# Altium PCB TPA6120A2 Headphone Amp.PcbDoc
Units mm, origin at the board's own origin, x right, y up, seen from the top; angles counter-clockwise.
Board outline 110 x 120 mm, 2 copper layers (Top Layer, Bottom Layer), stack 1.571 mm thick; 43 components, 26 nets, 121 pads, 140 vias.
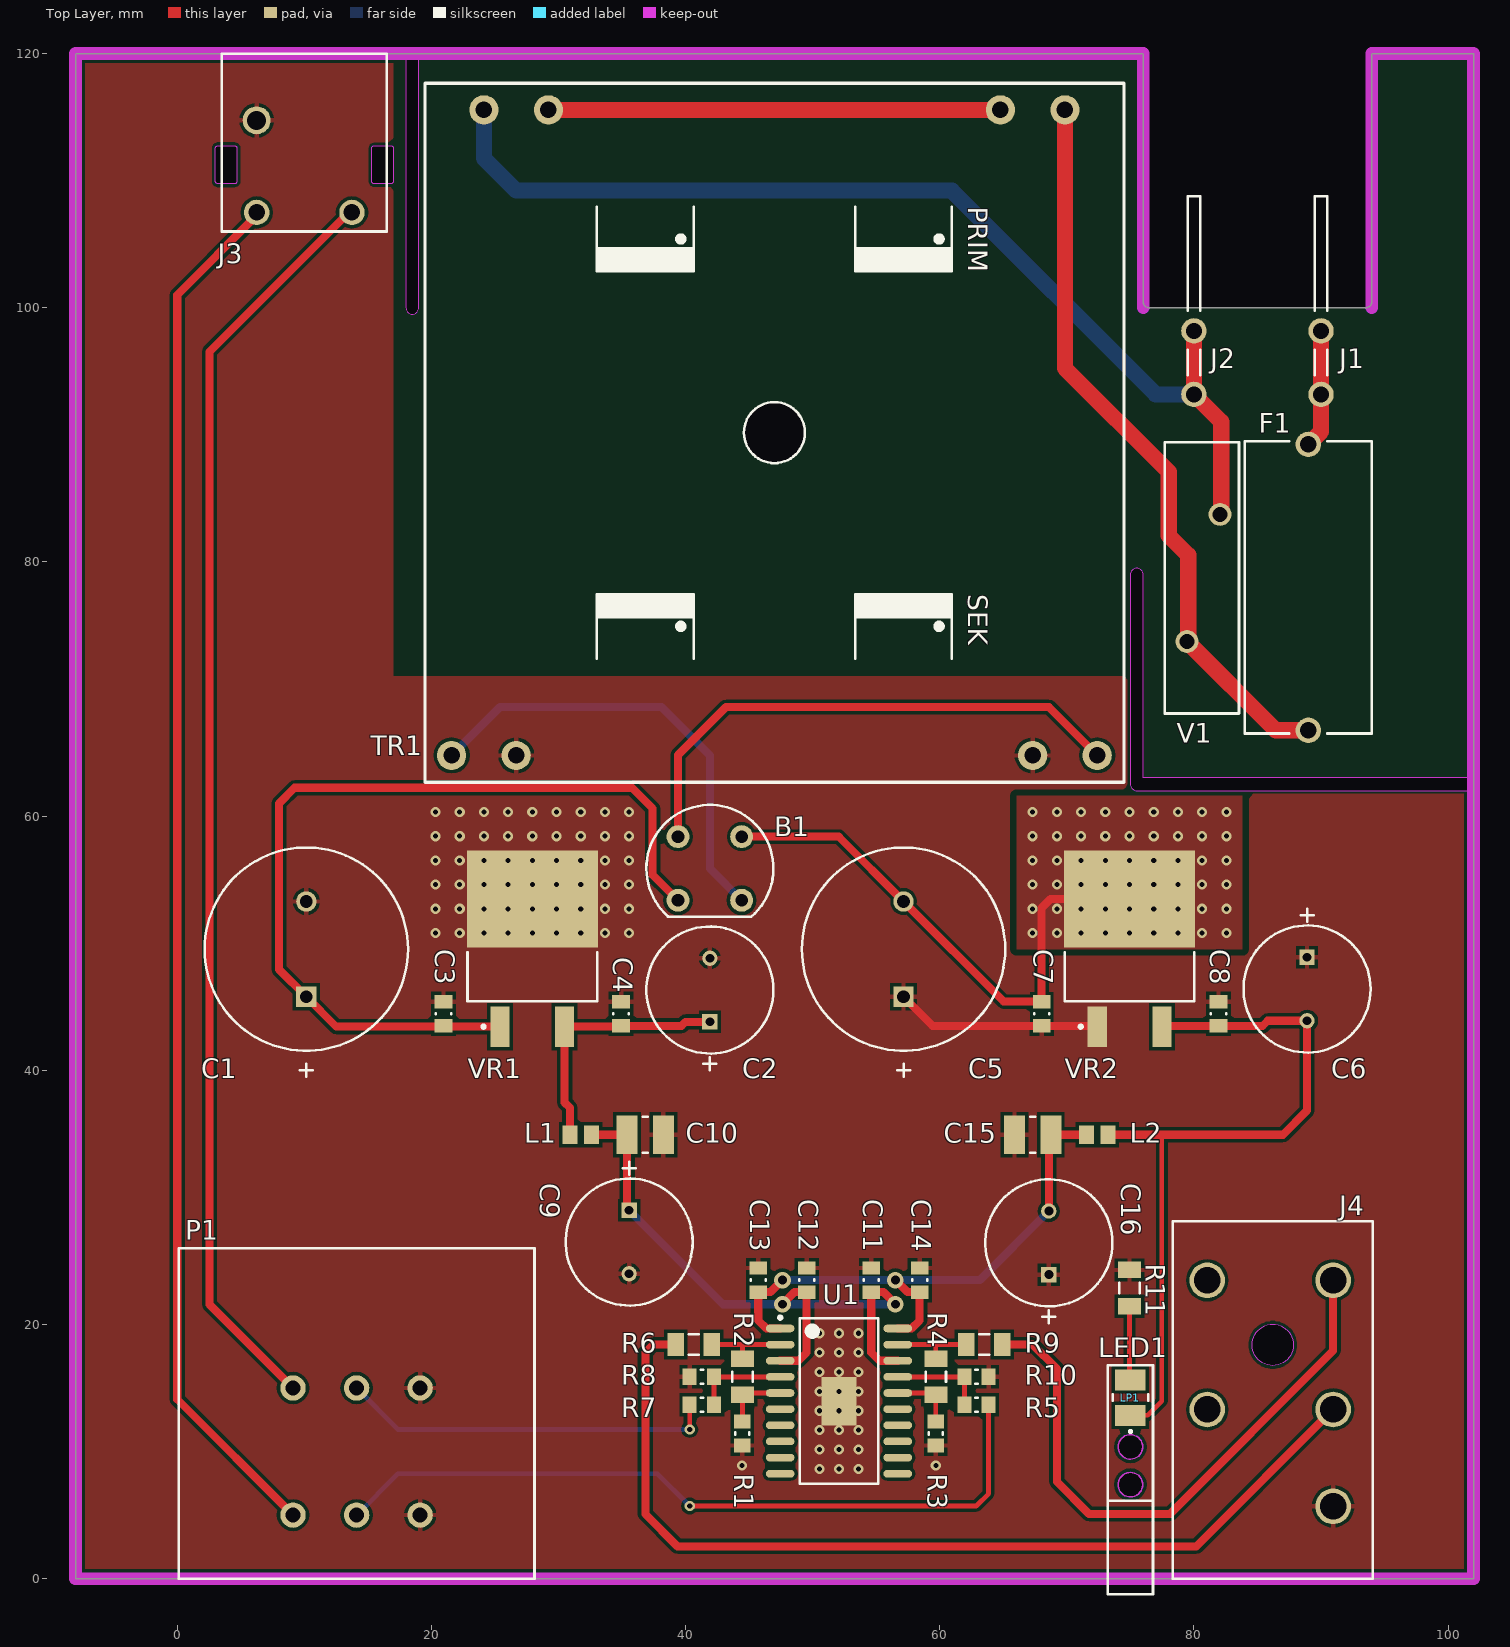
[diagram p0: Top Layer view]
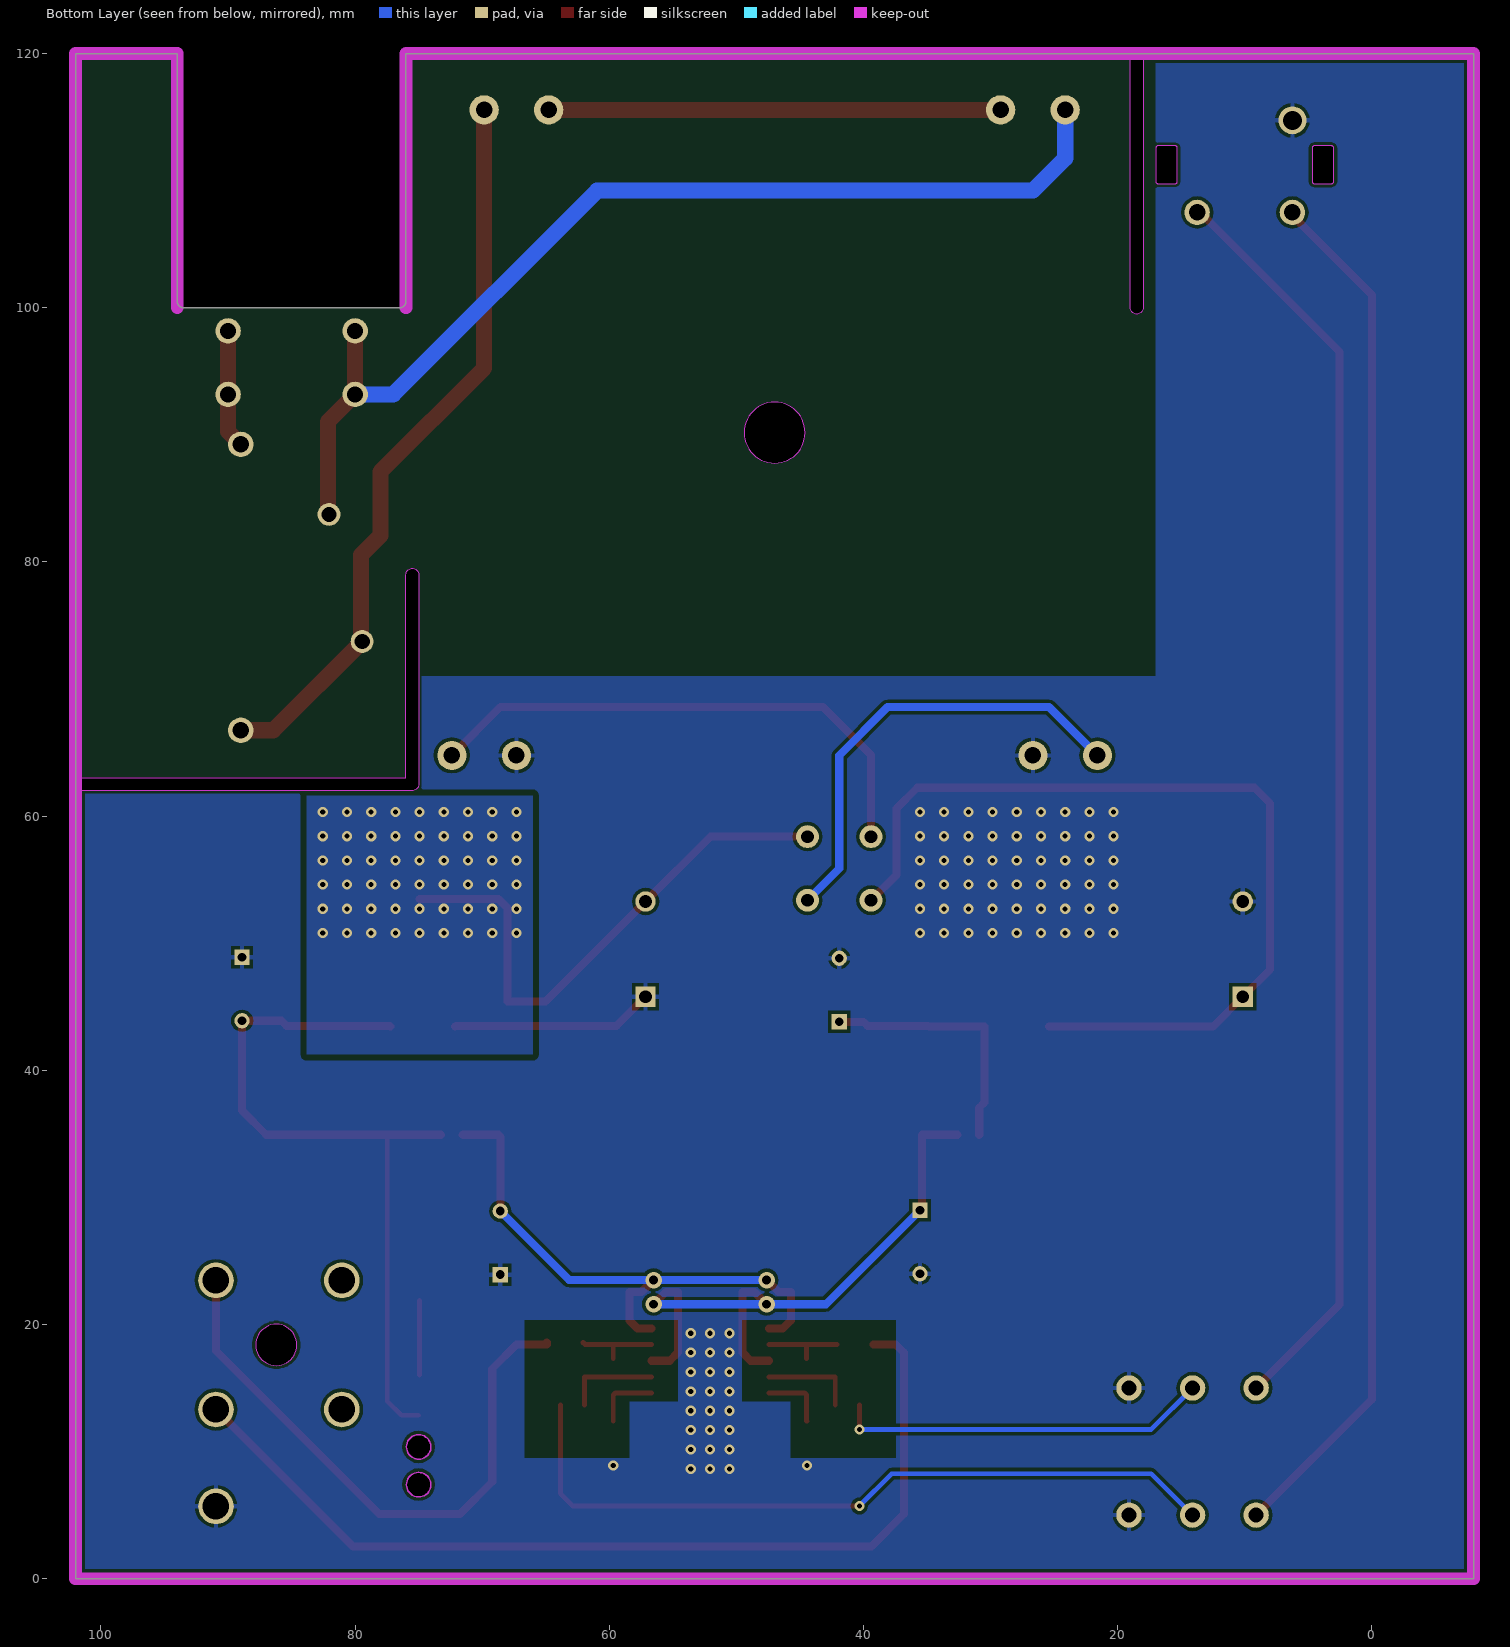
[diagram p1: Bottom Layer view, seen from below]
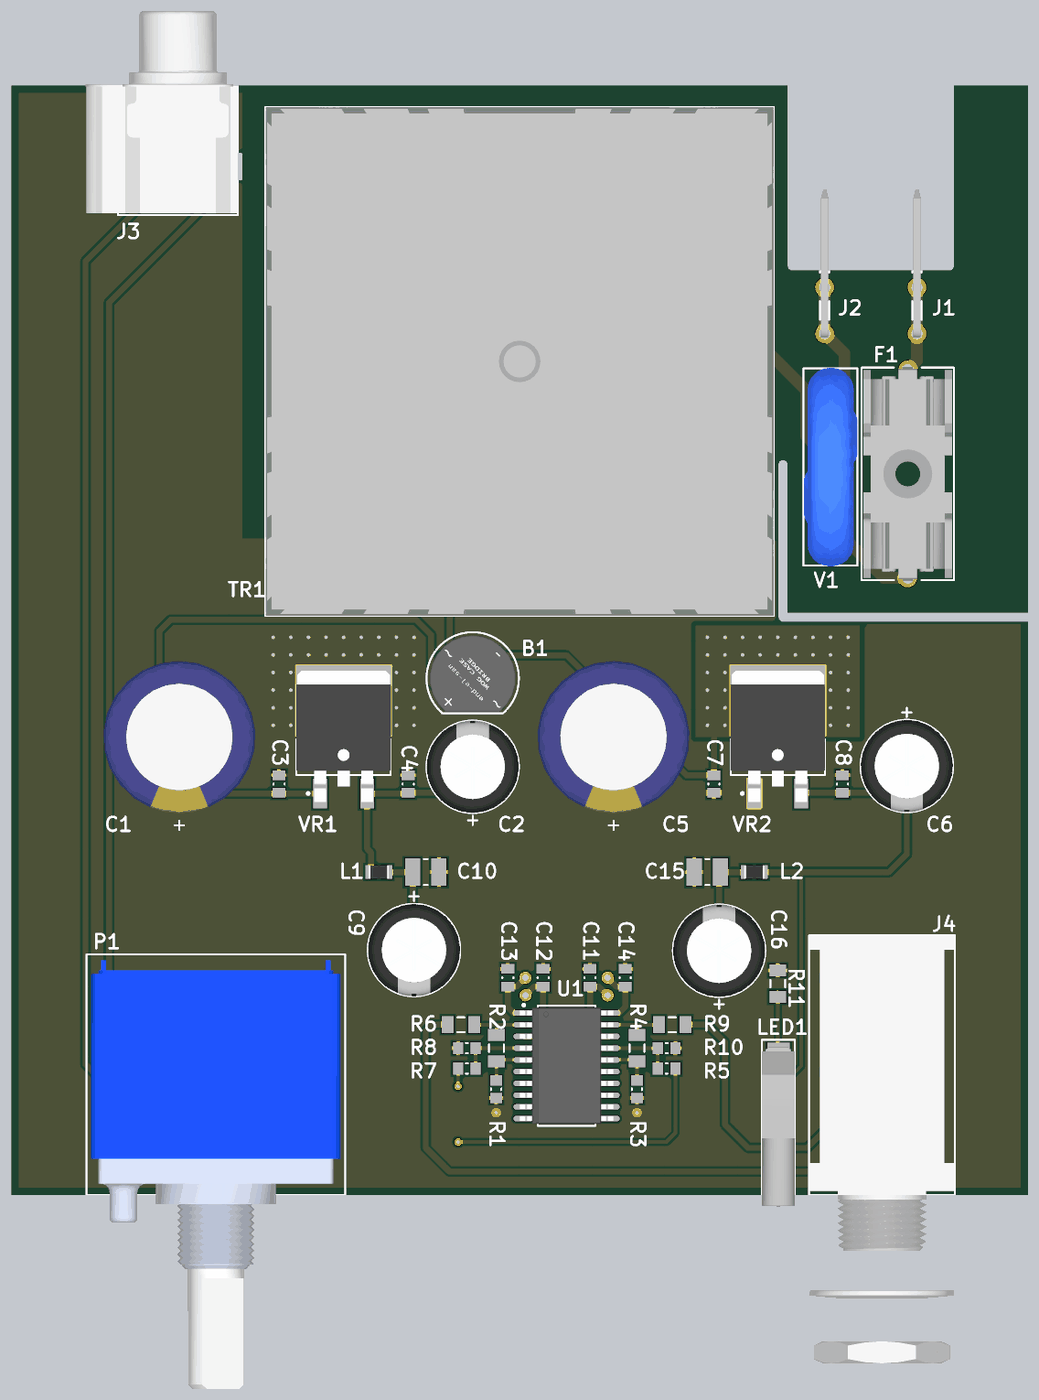
[diagram p2: 3D render of the assembled board from above, using the file's embedded part models]

## Layer stack, top to bottom
Top Solder: solder mask 0.0102, Solder Resist, Dk 3.5
Top Layer: signal copper 0.0356
Dielectric 1: dielectric 1.5, FR-4, Dk 4.8
Bottom Layer: signal copper 0.0356
Bottom Solder: solder mask 0.0102, Solder Resist, Dk 3.5

## Board outline
-8,0 102,0 102,120 94,120 94,100.5 cw(c93.5,100.5) 93.5,100 76.5,100 cw(c76.5,100.5) 76,100.5 76,120 -8,120
cut-out: 75,79 75,62.5 ccw(c75.5,62.5) 75.5,62 102,62 102,63 76,63 76,79 ccw(c75.5,79)
cut-out: 18,120 18,100 ccw(c18.5,100) 19,100 19,120

## Design rules (kind name [scope] priority, off if disabled: settings)
Clearance Clearance_VIN [InNet('-VIN')] p1: gap=0.254 ignorepadtopadclearanceinfootprint=FALSE except(0: Arc-Hole Track-Hole SMDPad-Hole THPad-Hole Via-Hole Fill-Hole Poly-Hole Region-Hole Text-Hole; 0.508: Poly-Poly)
Clearance "Schematic Clearance Constraint" [InNetClass('Mains')] p2: gap=2.5 ignorepadtopadclearanceinfootprint=FALSE except(0: Arc-Hole Track-Hole SMDPad-Hole THPad-Hole Via-Hole Fill-Hole Poly-Hole Region-Hole Text-Hole)
Clearance [All] p3: gap=0.254 ignorepadtopadclearanceinfootprint=FALSE except(0: Arc-Hole Track-Hole SMDPad-Hole THPad-Hole Via-Hole Fill-Hole Poly-Hole Region-Hole Text-Hole)
Height [All] p1: minheight=0 maxheight=50 prefheight=12.7
MinimumSolderMaskSliver MinimumSolderMaskSliver_Thermal [HasFootprint('TI-DWP20-3730X2350TP_N')] p1: minsoldermaskwidth=0.076
MinimumSolderMaskSliver [All] p2: minsoldermaskwidth=0.254
PolygonConnect PolygonConnect_Thermal [HasFootprint('TI-DWP20-3730X2350TP_N') OR HasFootprint('D2PAK') OR (IsVia AND InNet('GND')) OR (IsVia AND InNet('-VIN'))] p1: connectstyle=Direct reliefconductorwidth=0.254 reliefentries=4 polygonreliefangle="90 Angle" airgapwidth=0.254
PolygonConnect [All] p2: connectstyle=Relief reliefconductorwidth=0.381 reliefentries=4 polygonreliefangle="90 Angle" airgapwidth=0.254
RoutingVias [All] p1: holewidth=0.6 width=1.2 viastyle="Through Hole" minholewidth=0.4 minwidth=0.8 maxholewidth=0.7 maxwidth=1.3
SilkToSilkClearance [All] p1: silktosilkclearance=0.102
SilkToSolderMaskClearance [IsPad] p1: minsilkscreentomaskgap=0.152 clearancetoexposedcopper=TRUE
SolderMaskExpansion [All] p1: expansion=0.102
Width "Schematic Width Constraint" [InNetClass('Mains')] p1: maxlimit=1.27 minlimit=0.508 preferedwidth=0.762
Width [All] p2: maxlimit=0.635 minlimit=0.254 preferedwidth=0.381
26 further rules are at their usual default settings.

## Classes and differential pairs
net class Mains: NetF1_1 NetF1_2 NetJ2_1 NetTR1_4

## Components (designator, comment, footprint, x,y, rotation, side; value= is the part's Value field where it differs from the comment)
B1 "100V, 1.5A" WOG 41.91,55.88 r0 top
C1 "4700µF" "CAP POL 16x25 RM 7.5MM" 10.16,49.53 r270 top
C2 "100µF" "cap pol 10x12.5mm rm 5mm" 41.91,43.815 r90 top
C3 "100nF" CAP0805_M 20.955,44.45 r270 top
C4 "100nF" CAP0805_M 34.925,44.45 r270 top
C5 "4700µF" "CAP POL 16x25 RM 7.5MM" 57.15,49.53 r270 top
C6 "100µF" "cap pol 10x12.5mm rm 5mm" 88.9,48.895 r270 top
C7 "100nF" CAP0805_M 68.018,44.45 r270 top
C8 "100nF" CAP0805_M 81.936,44.45 r90 top
C9 "100µF" "cap pol 10x12.5mm rm 5mm" 35.56,28.986 r270 top
C10 "10µF" CAP1210_M 36.83,34.925 r180 top
C11 "100nF" CAP0805_M 54.61,23.495 r270 top
C12 "100nF" CAP0805_M 49.53,23.495 r270 top
C13 "100nF" CAP0805_M 45.72,23.495 r270 top
C14 "100nF" CAP0805_M 58.42,23.495 r270 top
C15 "10µF" CAP1210_M 67.31,34.925 r0 top
C16 "100µF" "cap pol 10x12.5mm rm 5mm" 68.58,23.918 r90 top
F1 "Fuse 5x20mm" 0031.8201 89,78 r270 top
J1 "" 928814-1 90,95.68 r90 top
J2 "" 928814-1 80,95.68 r90 top
J3 "Dual RCA Socket" PJRAS1X2S__X 10,120 r180 top
J4 "Headphone Jack, 1/4\" 3 Pos." RA49B 86,0 r270 top
L1 "330R@100MHz" INDC2012X14N 31.75,34.925 r0 top
L2 "330R@100MHz" INDC2012X14N 72.39,34.925 r0 top
LED1 "597-3XXX-20XF" 597-3XXX-20XF 75,14.25 r270 top
LP1 "Light pipe" 515-1049F 75,14.25 r90 top
P1 "ALPS 50k, stereo" "ALPS RK27112" 14.11,10 r270 top
R1 "1k" RES0805_M 44.45,11.43 r90 top
R2 "1k" RES1206_M 44.479,15.875 r270 top
R3 "1k" RES0805_M 59.69,11.43 r90 top
R4 "1k" RES1206_M 59.69,15.875 r270 top
R5 "49R9" RES0805_M 62.894,13.671 r180 top
R6 "10R" RES1206_M 40.64,18.415 r180 top
R7 "49R9" RES0805_M 41.275,13.671 r0 top
R8 "4k02" RES0805_M 41.275,15.875 r0 top
R9 "10R" RES1206_M 63.5,18.415 r0 top
R10 "4k02" RES0805_M 62.894,15.875 r180 top
R11 "560R" RES1206_M 74.93,22.86 r90 top
TR1 "10VA, 2x15V" "Talema 10VA" 46.99,90.17 r270 top
U1 "TPA6120A2" TI-DWP20-3730X2350TP_N 52.07,13.97 r0 top
V1 "275VAC, 215J" S20K275E2 80.752,78.74 r270 top
VR1 "12V, 1A" D2PAK 27.94,49.53 r90 top
VR2 "-12V, 1A" D2PAK 74.93,49.53 r90 top

## Footprints (in the part's own frame and the unit in brackets; to place one, negate y for a bottom-side part, rotate by r counter-clockwise, add the part's x,y. Pads: shape width x height; smd on the part's side, far side on the other; paste and mask are expansions set on the pad)
0031.8201 [mm] "Schurter, offener Sicherungshalter, 5 x 20 mm"
  round 2 hole 1.3: 1(-11.25,0) 2(11.25,0)
  silkscreen extent -11.5,-5 11.5,5, body extent -11.55,-4.8 11.55,4.8, height 11.5
515-1049F [mm] "Dialight 515-1049F Lightpipe"
  Keep-Out Layer board cut-out: -3.886,-0.965 -4.256,-0.892 -4.569,-0.682 -4.778,-0.369 -4.851,0 -4.851,0 -4.778,0.369 -4.569,0.682 -4.256,0.892 -3.886,0.965 -3.886,0.965 -3.517,0.892 -3.204,0.682 -2.994,0.369 -2.921,0 -2.921,0 -2.994,-0.369 -3.204,-0.682 -3.517,-0.892 -3.886,-0.965
  Keep-Out Layer board cut-out: -6.858,-0.965 -7.227,-0.892 -7.54,-0.682 -7.75,-0.369 -7.823,0 -7.823,0 -7.75,0.369 -7.54,0.682 -7.227,0.892 -6.858,0.965 -6.858,0.965 -6.489,0.892 -6.176,0.682 -5.966,0.369 -5.893,0 -5.893,0 -5.966,-0.369 -6.176,-0.682 -6.489,-0.892 -6.858,-0.965
  Keep-Out Layer circle w0.1: c-3.886,0 r0.965
  Keep-Out Layer circle w0.1: c-6.858,0 r0.965
  silkscreen extent -15.49,-1.78 2.54,1.78, body extent -15.49,-1.78 1.27,1.78, height 5.27
597-3XXX-20XF [mil] "Dialight 597-3XXX-20XF"
  rect 65x95 smd: 1(-55,0) 2(55,0)
  silkscreen extent -10,-55 109,55, body extent -69,-55 69,55, height 81
928814-1 [mm] "Flachstecker für Printmontage, Breite 6,35mm"
  round 2 hole 1.25: 1(-2.5,0) 1(2.5,0)
  silkscreen extent -1,-0.5 13.1,0.5, body extent -2.9,-0.4 13.1,0.4, height 7.6
"ALPS RK27112" [mm] "ALPS RK27112, Stereo Audio Pot"
  round 2 hole 1.2: 1(5,-5) 2(5,0) 3(5,5) 4(-5,-5) 5(-5,0) 6(-5,5)
  silkscreen extent -16,-14 10,14, body extent -15.4,-13.5 31,13.5, height 25
CAP0805_M [mm] "Chip Capacitor, 2-Leads, Body 2,00x1,25mm, IPC Medium Density"
  rect 1.05x1.4 smd: 1(-0.95,0) 2(0.95,0)
  silkscreen extent -0.05,-0.6 0.05,0.6, body extent -1.05,-0.67 1.05,0.67, height 0.6
CAP1210_M [mm] "Chip Capacitor, 2-Leads, Body 3,50x2,85mm, IPC Medium Density"
  rect 1.65x3 smd: 1(-1.425,0) 2(1.425,0)
  silkscreen extent -0.2,-1.4 0.2,1.4, body extent -1.85,-1.5 1.85,1.5, height 2.1
"cap pol 10x12.5mm rm 5mm" [mm]
  rect 1.2x1.2 hole 0.7: 1(0,0)
  round 1.2 hole 0.7: 2(5,0)
  silkscreen extent -3.81,-5 7.5,5, body extent -2.5,-5 7.5,5, height 12.5
"CAP POL 16x25 RM 7.5MM" [mm]
  rect 1.6x1.6 hole 1: 1(3.75,0)
  round 1.6 hole 1: 2(-3.75,0)
  silkscreen extent -8,-8 10.05,8, body extent -8.25,-8.25 8.25,8.25, height 33.5
D2PAK [mm] "D2-PAK, 3-Pads, Body 7,77x8,48mm (max), IPC Medium Density"
  rect 3.2x1.5 smd: 1(-6.1,2.54) 3(-6.1,-2.54)
  rect 7.6x10.3 smd: 4(3.95,0)
  silkscreen extent -6.22,-5.1 -0.25,5.1, body extent -7.03,-5.13 7.17,5.13, height 4.57
INDC2012X14N [mm] "Chip Inductor, 2-Leads, Body 2,00x1,25mm, IPC Medium Density"
  rect 1.19x1.47 smd: 1(-0.855,0) 2(0.855,0)
  body extent -1.1,-0.72 1.1,0.72, height 1.45
PJRAS1X2S__X [mm] "2 vertical pos. RCA jack"
  round 2 hole 1.3: 1(-3.75,12.5) 2(3.75,12.5)
  round 2.2 hole 1.5: 3(3.75,5.25)
  Keep-Out Layer board cut-out: 5.3,7.45 5.3,10.05 5.315,10.127 5.359,10.191 5.423,10.235 5.5,10.25 5.5,10.25 6.8,10.25 6.9,10.223 6.973,10.15 7,10.05 7,10.05 7,7.45 6.973,7.35 6.9,7.277 6.8,7.25 6.8,7.25 5.5,7.25 5.4,7.277 5.327,7.35 5.3,7.45
  Keep-Out Layer board cut-out: -7,7.45 -7,10.05 -6.973,10.15 -6.9,10.223 -6.8,10.25 -6.8,10.25 -5.5,10.25 -5.4,10.223 -5.327,10.15 -5.3,10.05 -5.3,10.05 -5.3,7.45 -5.327,7.35 -5.4,7.277 -5.5,7.25 -5.5,7.25 -6.8,7.25 -6.877,7.265 -6.941,7.309 -6.985,7.373 -7,7.45
  silkscreen extent -6.5,0 6.5,14, body extent -6.5,-8.1 10,13.79, height 28.75
RA49B [mil]
  round 110.24 hole 82: 1(-224,195) 2(-524,195) 3(-924,195) 4(-924,-195) 5(-524,-195)
  Keep-Out Layer board cut-out: -724,-55.98 -748.48,-51.11 -769.24,-37.24 -783.11,-16.48 -787.98,8 -787.98,8 -783.11,32.48 -769.24,53.24 -748.48,67.11 -724,71.98 -724,71.98 -699.52,67.11 -678.76,53.24 -664.89,32.48 -660.02,8 -660.02,8 -664.89,-16.48 -678.76,-37.24 -699.52,-51.11 -724,-55.98
  silkscreen extent -1107,-302 0,318, body extent -1104,-299 717,316, height 800
RES0805_M [mm] "Chip Resistor, 2-Leads, Body 2,00x1,25mm, IPC Medium Density"
  rect 1.1x1.3 smd: 1(-0.95,0) 2(0.95,0)
  silkscreen extent -0.1,-0.55 0.1,0.55, body extent -1.05,-0.67 1.05,0.68, height 0.6
RES1206_M [mm] "Chip Resistor, 2-Leads, Body 3,10x1,60mm, IPC Medium Density"
  rect 1.3x1.8 smd: 1(-1.425,0) 2(1.425,0)
  silkscreen extent -0.4,-0.8 0.4,0.8, body extent -1.63,-0.87 1.62,0.87, height 0.65
S20K275E2 [mm] "Varistor TDK S20K275E2"
  round 1.8 hole 1.2: 1(-5,1.3) 2(5,-1.3)
  silkscreen extent -10.67,-3.05 10.67,2.79, body extent -10.75,-3 10.75,2.8, height 24.5
"Talema 10VA" [mm] "Talema 70000 series, 10VA"
  round 2.3 hole 1.3: 3(-25.4,22.86) 4(-25.4,17.78) 5(-25.4,-17.78) 6(-25.4,-22.86) 11(25.4,-25.4) 12(25.4,-20.32) 13(25.4,20.32) 14(25.4,25.4)
  Keep-Out Layer board cut-out: 0,-2.4 -0.919,-2.217 -1.697,-1.697 -2.217,-0.919 -2.4,0 -2.4,0 -2.217,0.918 -1.697,1.697 -0.919,2.217 0,2.4 0,2.4 0.918,2.217 1.697,1.697 2.217,0.918 2.4,0 2.4,0 2.217,-0.919 1.697,-1.697 0.918,-2.217 0,-2.4
  silkscreen extent -27.5,-27.5 27.5,27.5, body extent -27.51,-27.51 27.51,27.51, height 26.3
TI-DWP20-3730X2350TP_N [mm] "SOP, 20-Leads, Body 12.825x7.52mm, Pitch 1.27mm, Thermal Pad 3.47X2.35mm, IPC Medium Density"
  oval 2.25x0.6 smd: 1(-4.625,5.715) 2(-4.625,4.445) 3(-4.625,3.175) 4(-4.625,1.905) 5(-4.625,0.635) 6(-4.625,-0.635) 7(-4.625,-1.905) 8(-4.625,-3.175) 9(-4.625,-4.445) 10(-4.625,-5.715) 11(4.625,-5.715) 12(4.625,-4.445) 13(4.625,-3.175) 14(4.625,-1.905) 15(4.625,-0.635) 16(4.625,0.635) 17(4.625,1.905) 18(4.625,3.175) 19(4.625,4.445) 20(4.625,5.715)
  rect 2.79x3.81 smd: 21(0,0)
  silkscreen extent -4.75,-6.5 3.1,6.69, body extent -5.07,-6.3 5.07,6.3, height 2.24
WOG [mm] "WOG Style Case"
  round 1.8 hole 1: 1(-2.5,-2.5) 2(2.5,-2.5) 3(2.5,2.5) 4(-2.5,2.5)
  silkscreen extent -5,-3.8 5,5, body extent -4.67,-3.65 4.67,4.68, height 4.83

## Part data
B1: library part W01G-E4/51, "RECTIFIER BRIDGE 1.5A 100V WOG"
C1 C5: library part UVY1E472MHD, "CAP ALUM 4700UF 20% 25V RADIAL"
C2 C6 C9 C16: library part EEU-FC1J101, "CAP ALUM 100UF 20% 63V RADIAL"
C3 C4 C7 C8 C11 C12 C13 C14: library part C0805C104K5RACTU, "CAP CER 0.1UF 50V 10% X7R 0805"
C10 C15: library part C1210C106K5RACTU, "CAP CER 10UF 50V X7R 1210"
F1: library part 0031.8201, "FUSE BLOK CARTRIDGE 500V 10A PCB"
J1 J2: library part 928814-1, "CONN QC TAB 0.250 SOLDER"
J3: library part PJRAS1X2S01X, "PHONO JACK 2POS R/A RED/WHT"
J4: library part RA49B12B, "CONN JACK R/A 3-COND DBL OPEN"
L1 L2: library part MPZ2012S331AT000, "FERRITE CHIP 330 OHM 2.5A 0805"
LED1: library part 597-3001-202F, "LED RED CLEAR 2PLCC SMD"
LP1: library part 5151049F, "LIGHT PIPE SGL ELEMENT"
P1: library part "ALPS RK27112-F25-C0-A203", "Pot, Stereo"
R1 R3: library part TNPW08051K00BEEA, "RES SMD 1K OHM 0.1% 1/8W 0805"
R2 R4: library part TNPW12061K00BEEA, "RES SMD 1K OHM 0.1% 1/4W 1206"
R5 R7: library part TNPW080549R9BEEA, "RES SMD 49.9 OHM 0.1% 1/8W 0805"
R6 R9: library part PAT1206E10R0BST1, "RES SMD 10 OHM 0.1% 0.4W 1206"
R8 R10: library part MCU0805MD4021BP100, "RES SMD 4.02K OHM 0.1% 1/5W 0805"
R11: library part CRCW1206560RFKEAHP, "RES SMD 560 OHM 1% 1/2W 1206"
TR1: library part "Talema 70043k", "XFRMR TOROIDAL 10VA THRU HOLE"
U1: library part TPA6120A2DWPR, "IC AMP AUDIO .08W HIFI 20SOPWR"
V1: library part S20K275E2, "VARISTOR 387V 10KA DISC 20MM"
VR1: library part 7812, "IC REG LDO 12V 1.5A D2PAK"
VR2: library part 7912, "IC REG LDO -12V 1.5A D2PAK"

## Via types
v1: diameter 0.8, hole 0.4, Top Layer to Bottom Layer, 136 vias
v2: diameter 1.3, hole 0.7, Top Layer to Bottom Layer, 4 vias

## Nets (pads, with @x,y where several pads share a name; then routed paths per layer and width w, separated by ;. In a path a pad name is that pad's centre, name@x,y a point inside that pad or via, vN(x,y) a via of type N, cw(c..) or ccw(c..) an arc to the next point about the centre after c; other vN are vias at no path point)
+12V: C2.1 C4.2 L1.1 VR1.3 | length 20.3
  Top Layer w0.635: L1.1 30.895,37.05 30.48,37.465 VR1.3 34.855,43.43 C4.2 39.69,43.5 40.005,43.815 C2.1
+VIN: B1.1 C1.1 C3.2 VR1.1 | length 71
  Top Layer w0.635: VR1.1 12.51,43.43 C1.1 8,47.94 8,61 9.23,62.23 35.77,62.23 37.413,60.587 37.413,55.377 B1.1
-12V: C6.2 C8.1 L2.2 LED1.2 VR2.3 | length 59.3
  Top Layer w0.381: LED1.2 76.353,12.853 77.47,13.97 77.47,34.925
  Top Layer w0.635: L2.2 77.47,34.925 86.995,34.925 88.9,36.83 C6.2 85.805,43.895 85.41,43.5 77.282,43.5 VR2.3@77.212,43.43
-VIN: B1.3 C5.2 C7.1 VR2.4 | length 43.6
  Top Layer w0.635: B1.3 52.05,58.38 C5.2 65.03,45.4 C7.1 68.018,52.778 68.72,53.48 VR2.4
  other v1: 67.31,50.8 69.215,50.8 71.12,50.8 73.025,50.8 74.93,50.8 76.835,50.8 78.74,50.8 80.645,50.8 82.55,50.8 67.31,52.705 69.215,52.705 71.12,52.705 73.025,52.705 74.93,52.705 76.835,52.705 78.74,52.705 80.645,52.705 82.55,52.705 67.31,54.61 69.215,54.61 71.12,54.61 73.025,54.61 74.93,54.61 76.835,54.61 78.74,54.61 80.645,54.61 82.55,54.61 67.31,56.515 69.215,56.515 71.12,56.515 73.025,56.515 74.93,56.515 76.835,56.515 78.74,56.515 80.645,56.515 82.55,56.515 67.31,58.42 69.215,58.42 71.12,58.42 73.025,58.42 74.93,58.42 76.835,58.42 78.74,58.42 80.645,58.42 82.55,58.42 67.31,60.325 69.215,60.325 71.12,60.325 73.025,60.325 74.93,60.325 76.835,60.325 78.74,60.325 80.645,60.325 82.55,60.325
GND: C1.2 C2.2 C3.1 C4.1 C5.1 C6.1 C7.2 C8.2 C9.2 C10.1 C11.1 C12.1 C13.1 C14.1 C15.1 C16.1 J3.3 J4.1 P1.3 P1.6 R1.1 R3.1 R8.1 R10.1 R11.2 TR1.12 TR1.13 U1.21 VR1.4 VR2.1 | length 16
  Top Layer w0.635: C5.1 59.43,43.5 C7.2 72.062,43.5 VR2.1@72.132,43.43
  other v1: 50.546,8.636 52.07,8.636 53.594,8.636 44.45,8.89 59.69,8.89 50.546,10.16 52.07,10.16 53.594,10.16 50.546,11.684 52.07,11.684 53.594,11.684 50.546,13.208 52.07,13.208 53.594,13.208 50.546,14.732 52.07,14.732 53.594,14.732 50.546,16.256 52.07,16.256 53.594,16.256 50.546,17.78 52.07,17.78 53.594,17.78 50.546,19.304 52.07,19.304 53.594,19.304 20.32,50.8 22.225,50.8 24.13,50.8 26.035,50.8 27.94,50.8 29.845,50.8 31.75,50.8 33.655,50.8 35.56,50.8 20.32,52.705 22.225,52.705 24.13,52.705 26.035,52.705 27.94,52.705 29.845,52.705 31.75,52.705 33.655,52.705 35.56,52.705 20.32,54.61 22.225,54.61 24.13,54.61 26.035,54.61 27.94,54.61 29.845,54.61 31.75,54.61 33.655,54.61 35.56,54.61 20.32,56.515 22.225,56.515 24.13,56.515 26.035,56.515 27.94,56.515 29.845,56.515 31.75,56.515 33.655,56.515 35.56,56.515 20.32,58.42 22.225,58.42 24.13,58.42 26.035,58.42 27.94,58.42 29.845,58.42 31.75,58.42 33.655,58.42 35.56,58.42 20.32,60.325 22.225,60.325 24.13,60.325 26.035,60.325 27.94,60.325 29.845,60.325 31.75,60.325 33.655,60.325 35.56,60.325
LIN: J3.1 P1.4 | length 100
  Top Layer w0.635: P1.4 2.54,21.57 2.54,96.54 13.5,107.5 J3.1
LOUT: J4.2 R6.2 | length 75
  Top Layer w0.635: R6.2 37.465,18.415 36.83,17.78 36.83,5.08 39.37,2.54 80.183,2.54 J4.2
NetB1_2: B1.2 TR1.11 | length 35.9
  Bottom Layer w0.635: TR1.11 25.4,68.58 38.1,68.58 41.91,64.77 41.91,55.88 B1.2
NetB1_4: B1.4 TR1.14 | length 42.5
  Top Layer w0.635: B1.4 39.41,64.81 43.18,68.58 68.58,68.58 TR1.14
NetC9_1: C9.1 C10.2 C11.2 C12.2 L1.2 U1.3 U1.18 | length 52
  Top Layer w0.635: L1.2 C10.2 35.405,29.141 C9.1 ; U1.3 48.895,17.145 49.53,17.78 C12.2 48.58,22.545 v2(47.625,21.59) ; v2@56.2,21.59 v2(56.515,21.59) 55.56,22.545 C11.2 54.61,17.78 55.245,17.145 U1.18
  Bottom Layer w0.635: C9.1 42.956,21.59 v2(47.625,21.59) v2(56.515,21.59)
NetC13_2: C13.2 C14.2 C15.2 C16.2 L2.1 U1.1 U1.20 | length 45.1
  Top Layer w0.635: U1.1 46.355,19.685 45.72,20.32 C13.2 46.675,22.545 v2(47.625,23.495) ; v2(56.515,23.495) 57.465,22.545 C14.2 58.42,20.32 57.785,19.685 U1.20 ; C16.2 68.58,34.77 C15.2 L2.1
  Bottom Layer w0.635: v2(47.625,23.495) v2(56.515,23.495) 63.157,23.495 C16.2
NetF1_1: F1.1 J1.1 | length 9.3
  Top Layer w1.27: F1.1 90,90.25 90,93.18 J1.1@90,98.18
NetF1_2: F1.2 TR1.3 V1.2 | length 58.1
  Top Layer w1.27: TR1.3 69.85,95.25 78.017,87.083 78.017,82.069 79.547,80.538 79.547,74 V1.2@79.63,73.918 ; V1.2 86.442,66.75 F1.2
NetJ2_1: J2.1 TR1.6 V1.1 | length 82.4
  Top Layer w1.27: J2.1@80,98.18 80,93.18 82.147,91.033 V1.1@82.147,84
  Bottom Layer w1.27: TR1.6 24.13,111.76 26.67,109.22 60.96,109.22 77,93.18 J2.1@80,93.18
NetLED1_1: LED1.1 R11.1 | length 5.9
  Top Layer w0.381: LED1.1@74.93,16.002 R11.1@74.93,21.91
NetP1_2: P1.2 R5.1 | length 59.5
  Top Layer w0.381: v1(40.325,5.715) 62.865,5.715 63.844,6.694 R5.1
  Bottom Layer w0.381: P1.2 17.365,8.255 37.785,8.255 v1(40.325,5.715)
NetP1_5: P1.5 R7.1 | length 29.5
  Top Layer w0.381: v1(40.325,11.745) R7.1
  Bottom Layer w0.381: P1.5 17.365,11.745 v1(40.325,11.745)
NetR1_2: R1.2 R2.2 U1.5 | length 5.1
  Top Layer w0.381: R1.2 44.479,12.409 R2.2 44.634,14.605 U1.5
NetR2_1: R2.1 R6.1 U1.2 | length 6.5
  Top Layer w0.381: R6.1 44.45,18.415 ; R2.1 44.479,18.386 44.45,18.415 ; U1.2 44.45,18.415
NetR3_2: R3.2 R4.2 U1.16 | length 5.1
  Top Layer w0.381: U1.16 59.535,14.605 R4.2 R3.2
NetR4_1: R4.1 R9.1 U1.19 | length 6.6
  Top Layer w0.381: U1.19 59.69,18.415 ; R4.1 59.69,18.415 ; R9.1@62.075,18.578 61.911,18.415 59.69,18.415
NetR5_2: R5.2 R10.2 U1.17 | length 7.5
  Top Layer w0.381: U1.17 R10.2 R5.2
NetR7_2: R7.2 R8.2 U1.4 | length 7.4
  Top Layer w0.381: R7.2 R8.2 U1.4
NetTR1_4: TR1.4 TR1.5 | length 35.6
  Top Layer w1.27: TR1.5 TR1.4
RIN: J3.2 P1.1 | length 108.9
  Top Layer w0.635: J3.2 6.25,107.25 0,101 0,14.11 P1.1
ROUT: J4.3 R9.2 | length 47.9
  Top Layer w0.635: R9.2 R9.2@65.088,18.415 ; R9.2@64.925,18.578 R9.2@65.088,18.415 ; J4.3 90.953,17.928 78.105,5.08 71.755,5.08 69.215,7.62 69.215,16.51 67.31,18.415 R9.2@65.088,18.415
pads on no net: J4.4 J4.5 U1.6 U1.7 U1.8 U1.9 U1.10 U1.11 U1.12 U1.13 U1.14 U1.15

## Polygon pours and split planes (outlines as drawn)
-VIN on Top Layer "-VIN_L01_P010" (solid, pour order 10): 66.04,61.595 83.82,61.595 83.82,49.53 66.04,49.53
GND on Top Layer "GND_L01_P012" (solid, remove dead copper, pour order 12): -8,0 102,0 102,71 17,71 17,140 -8,140
-VIN on Bottom Layer "-VIN_L02_P011" (solid, pour order 11): 66.04,61.595 83.82,61.595 83.82,51.435 83.82,41.275 66.04,41.275
GND on Bottom Layer "GND_L02_P013" (solid, pour order 13): -8,0 102,0 102,62 75,62 75,71 17,71 17,120 -8,120

## Keep-outs
Keep-Out Layer:
  lines w1: 76,100 76,120 -8,120 -8,0 102,0 102,120 94,120 94,100

## Other copper
Bottom Layer:
  pour cut-out: 54.61,20.32 54.61,13.97 58.42,13.97 58.42,9.525 66.675,9.525 66.675,20.32
  pour cut-out: 49.53,20.32 49.53,13.97 45.72,13.97 45.72,9.525 43.18,9.525 37.465,9.525 37.465,20.32

## Silkscreen, mask and mechanical layers (free items; w line width, h text height)
Mechanical 1:
  drawing of 246 lines, arcs and shapes, not listed

## Dimensions
-8,120 to 85,120 on Mechanical 2
-8,120 to 10,108 on Mechanical 2
-8,0 to -8,120 on Mechanical 2
-8,0 to 102,0 on Mechanical 2
-8,0 to 14.11,5 on Mechanical 2
-8,0 to 75,-1.244 on Mechanical 2
-8,0 to 86.203,18.389 on Mechanical 2

## Text inside footprints (layer, text, board x,y; h text height)
TR1: Top Overlay "PRIM" at 62.23,107.95 h1.52 r270; Top Overlay "SEK" at 62.23,77.47 h1.52 r270